# EAGLE board Power Switching Circuit rev1 - old (EAGLE 9.6.2)
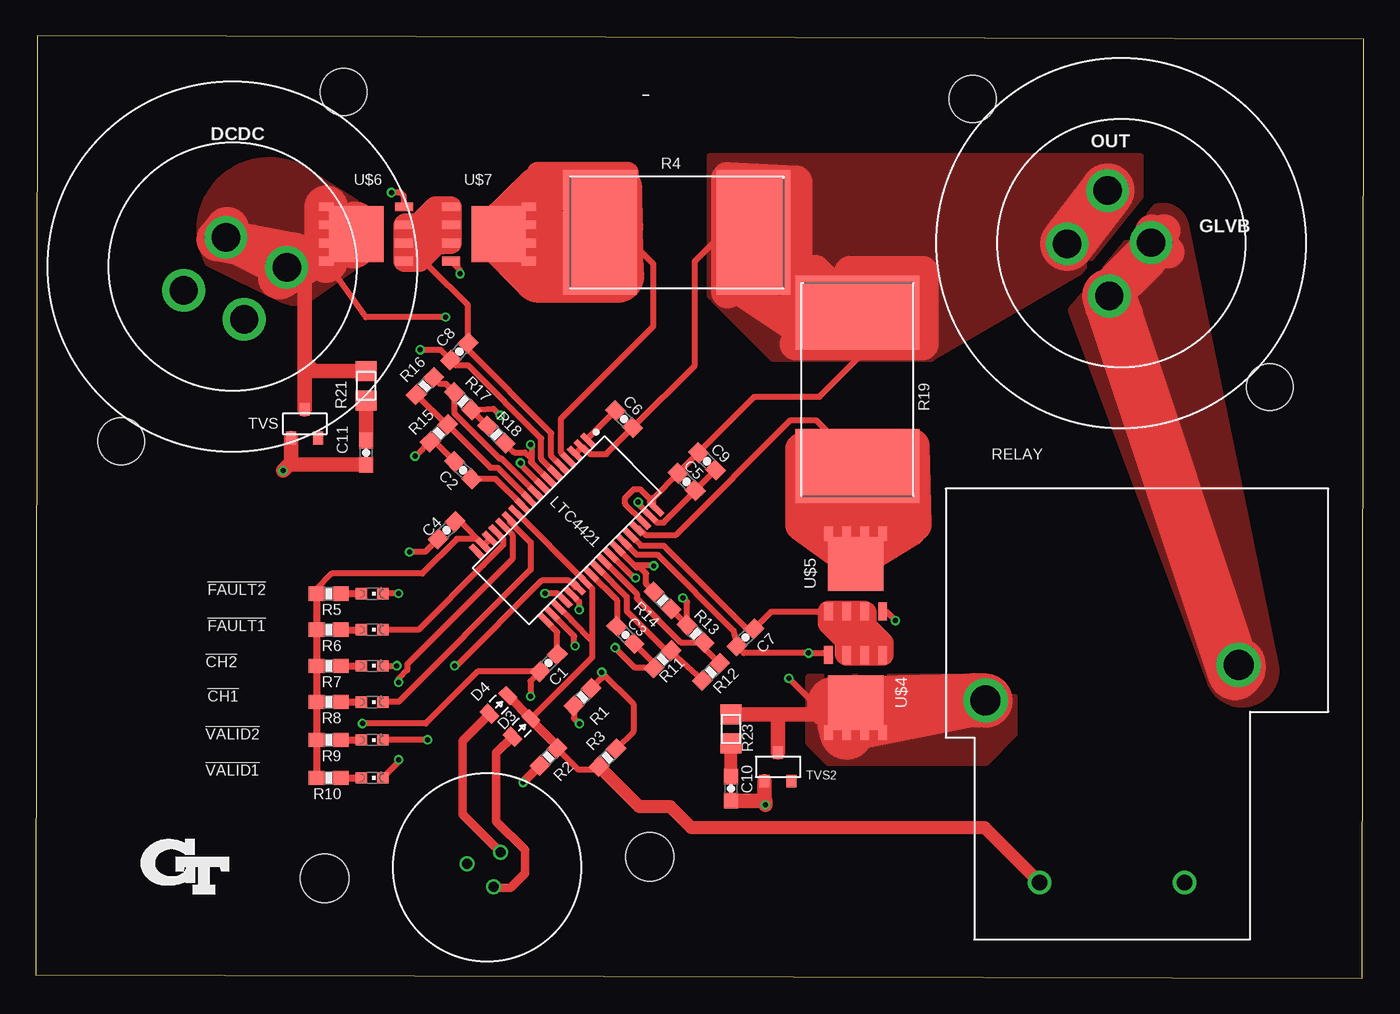
[diagram p0: board, top side]
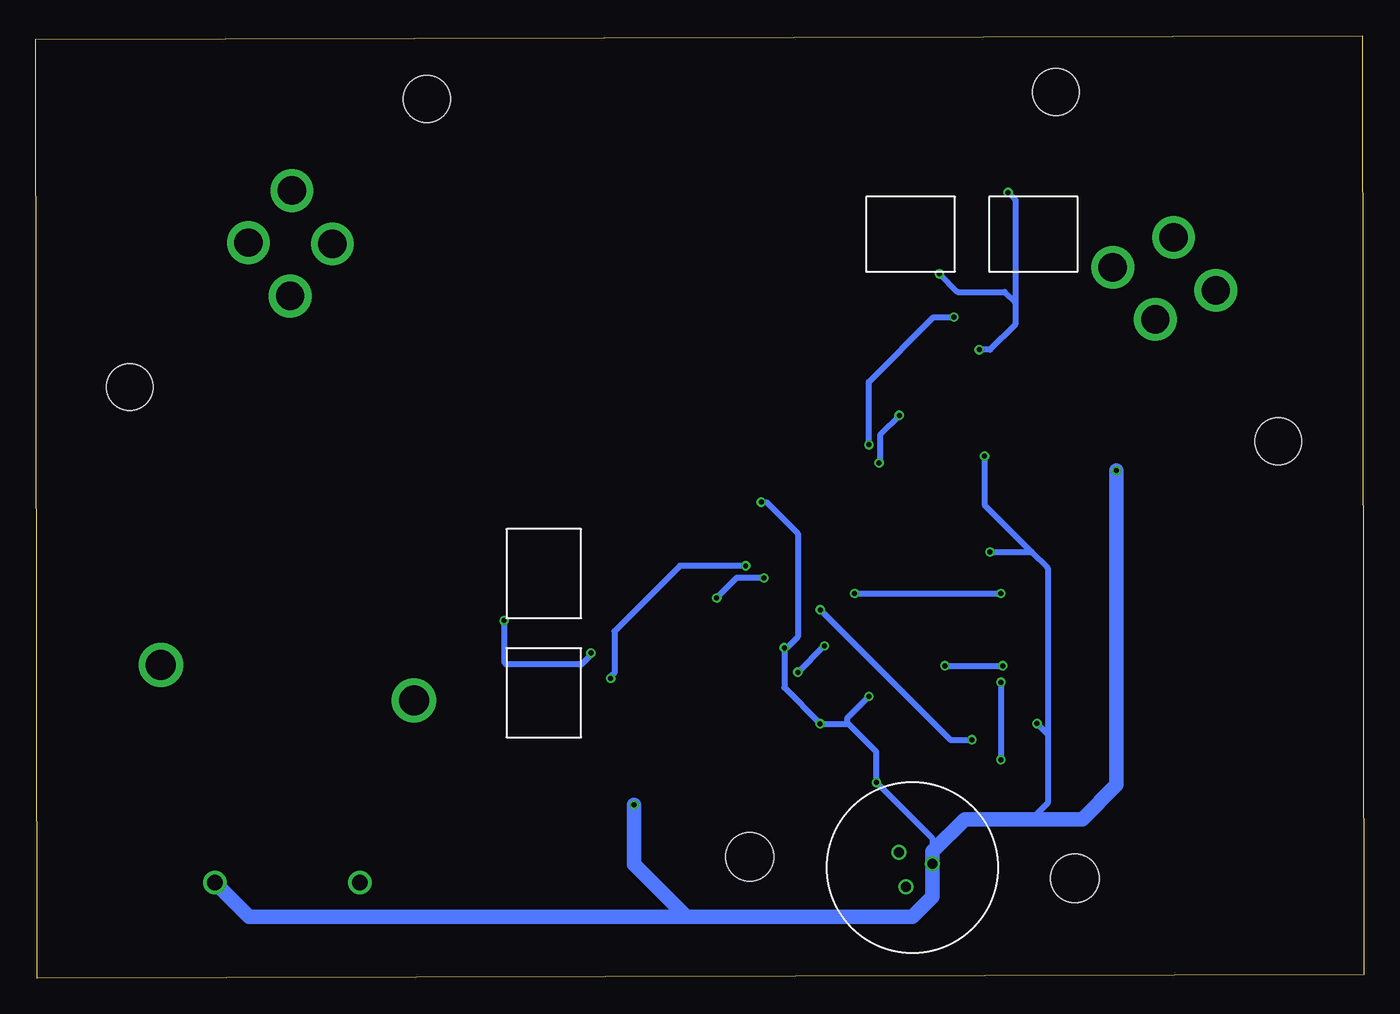
[diagram p1: board, bottom side, seen from below]

Size 93.4 x 66.28 mm. Coordinates in mm from the lower left corner, seen from the top.
Outline: 0,0.25 93.27,0 93.4,66.03 0.13,66.28 0,0.25
Copper layers (1*16): Top 0.035mm / dielectric 1.53mm / Bottom 0.035mm
Design rules "JLCPCB (2 Layer)": minimum track width 5mil, minimum drill 0.3mm, track to track 5mil, track to pad 5mil, pad to pad 5mil, via to via 20mil, smd to smd 5mil, copper to edge 0.2mm, drill to drill 21mil, minimum pad ring 6mil, minimum via ring 6mil, stop-mask expansion 6mil, vias tented up to drill 30mil, thermal gap 10mil

## Footprints (pad centres in the part's own frame; a part is rotated, then mirrored left to right if it is on the bottom)
0603-CAP = smd 1.1 x 1: 1 -0.85,0; 2 0.85,0
0805_D = smd 0.8 x 1.2: A -0.9,0; C 0.9,0
LED-603 = smd 0.8 x 0.8: A 0,-0.75; C 0,0.75
SSOP-36 = smd 0.42 x 1.25: 1 -5.525,-3.375; 2 -4.875,-3.375; 3 -4.225,-3.375; 4 -3.575,-3.375; 5 -2.925,-3.375; 6 -2.275,-3.375; 7 -1.625,-3.375; 8 -0.975,-3.375; 9 -0.325,-3.375; 10 0.325,-3.375; 11 0.975,-3.375; 12 1.625,-3.375; 13 2.275,-3.375; 14 2.925,-3.375; 15 3.575,-3.375; 16 4.225,-3.375; 17 4.875,-3.375; 18 5.525,-3.375; 19 5.525,3.375; 20 4.875,3.375; 21 4.225,3.375; 22 3.575,3.375; 23 2.925,3.375; 24 2.275,3.375; 25 1.625,3.375; 26 0.975,3.375; 27 0.325,3.375; 28 -0.325,3.375; 29 -0.975,3.375; 30 -1.625,3.375; 31 -2.275,3.375; 32 -2.925,3.375; 33 -3.575,3.375; 34 -4.225,3.375; 35 -4.875,3.375; 36 -5.525,3.375
0603-RES = smd 1.1 x 1: 1 -0.85,0; 2 0.85,0
5930-SENSE_RES = smd 5.207 x 8.738: 1 -5.397,0; 2 5.397,0
0805 = smd 1.4 x 1.5: 1 -1.025,0; 2 1.025,0
J115F11A*6* = drill 1.1: COIL1 -5.989,-11.049; COIL2 4.211,-11.049 | drill 2.1: CONTACT1 8.011,4.251; CONTACT2 -9.789,1.751
SOT-23 = smd 0.711 x 0.889: 1 -0.94,-1.003; 2 0.94,-1.003; 3 0,1.003
SO-8-POWERPAK = smd 1.27 x 0.61: 1 -2.54,1.778; 2 -2.54,0.508; 3 -2.54,-0.762; 4 -2.54,-2.032 | smd 1.016 x 0.61: D@5 2.921,-2.032; D@6 2.921,-0.762; D@7 2.921,0.508; D@8 2.921,1.778 | smd 3.81 x 3.912: D@PAD 0.813,-0.127
AUTOSPORT_12-04 = drill 2: 1 0,3.81; 2 3.708,0.889; 3 0,-2.108; 4 -3.708,0.889 | hole 3.3: -10.288,-10.288; 10.288,10.288
AUTOSPORT_04-35 = drill 0.7: A 1.24,0.339; B 0,-1.811; C -1.24,0.339 | hole 3.4: 8.1,7.719; -8.1,-8.481

## Placement (x,y rotation side)
C1  1nF  [0603-CAP]  36.08,22.16 225 top
C2  6.8nF  [0603-CAP]  30.06,35.72 135 top
C3  6.8nF  [0603-CAP]  41.47,24.13 315 top
C4  1uF  [0603-CAP]  28.9,31.5 225 top
C5  0.1uF  [0603-CAP]  45.78,34.91 135 top
C6  1uF  [0603-CAP]  41.38,39.31 135 top
C7  47nF  [0603-CAP]  49.91,23.95 225 top
C8  47nF  [0603-CAP]  29.79,44.07 225 top
C9  600uF  [0603-CAP]  47.22,36.35 315 top
C10  10uF  [0603-CAP]  48.89,13.34 270 top
C11  10uF  [0603-CAP]  23.24,36.96 270 top
D3  DIODEREMOVE_IN_XML  [0805_D]  34.19,17.62 45 top
D4  DIODEREMOVE_IN_XML  [0805_D]  32.57,19.24 45 top
LED1  BLUE  [LED-603]  23.66,14.09 270 top
LED2  BLUE  [LED-603]  23.66,16.75 270 top
LED3  GREEN  [LED-603]  23.66,19.42 270 top
LED4  GREEN  [LED-603]  23.66,21.96 270 top
LED5  RED  [LED-603]  23.66,24.5 270 top
LED6  RED  [LED-603]  23.66,27.04 270 top
LTC4421  LTC4421  [SSOP-36]  37.34,31.5 225 top
R1  0  [0603-RES]  38.46,19.77 225 top
R2  10k  [0603-RES]  36.07,15.55 45 top
R3  0  [0603-RES]  40.21,15.51 45 top
R4  0.001  [5930-SENSE_RES]  45.09,52.45 0 top
R5  100k  [0603-RES]  20.61,27.04 180 top
R6  100k  [0603-RES]  20.61,24.5 180 top
R7  100k  [0603-RES]  20.61,21.96 180 top
R8  100k  [0603-RES]  20.61,19.42 180 top
R9  100k  [0603-RES]  20.61,16.75 180 top
R10  100k  [0603-RES]  20.61,14.09 180 top
R11  31k  [0603-RES]  44.07,22.43 45 top
R12  19k  [0603-RES]  47.49,21.53 45 top
R13  9.5k  [0603-RES]  46.41,24.22 135 top
R14  950k  [0603-RES]  44.07,26.56 135 top
R15  35k  [0603-RES]  28.36,38.32 45 top
R16  11k  [0603-RES]  27.37,41.64 45 top
R17  6.5k  [0603-RES]  30.06,40.57 315 top
R18  950k  [0603-RES]  32.4,38.23 315 top
R19  0.001  [5930-SENSE_RES]  57.78,41.4 90 top
R21  0.55  [0805]  23.24,41.66 90 top
R23  0.65  [0805]  48.89,17.53 90 top
RELAY  J115F11A6*  [J115F11A*6*]  76.58,17.78 0 top
TVS  TVS_15V  [SOT-23]  18.92,38.99 0 top
TVS2  TVS_15V  [SOT-23]  52.2,14.86 0 top
U$4  SIR638ADP  [SO-8-POWERPAK]  57.78,20.19 270 top
U$5  SIR638ADP  [SO-8-POWERPAK]  57.53,28.32 90 top
U$6  SIR638ADP  [SO-8-POWERPAK]  23.37,52.2 180 top
U$7  SIR638ADP  [SO-8-POWERPAK]  31.75,52.45 0 top
X1  CONNECTOR-4AUTOSPORT  [AUTOSPORT_12-04]  76.33,51.69 90.9 top
X2  CONNECTOR-4AUTOSPORT  [AUTOSPORT_12-04]  13.84,50.04 192.5 top
X3  CONNECTOR-3  [AUTOSPORT_04-35]  31.5,7.49 138.8 top

## Library data of the parts
C1-C11 D3 D4 LED1-LED6 LTC4421 R1-R19 R21 R23 RELAY U$4-U$7 X1-X3 = HyTechDevices
TVS TVS2 = HyTechDevices; DKPN: GSOT15-E3-08CT-ND; MANUFACTURER: Vishay General Semiconductor - Diodes Division; MOPN: 78-GSOT15-E3-08; MPN: GSOT15-E3-08; VOLTAGE: 15V

## Nets
!CH1: LED3.C LTC4421.13
!CH2: LED4.C LTC4421.24
!FAULT1: LED5.C LTC4421.15
!FAULT2: LED6.C LTC4421.22
!SHDN: D3.C D4.C LTC4421.12 LTC4421.21 LTC4421.25 R2.2 R3.1 RELAY.COIL1
!VALID1: LED1.C LTC4421.14
!VALID2: LED2.C LTC4421.23
CASIN: C4.1 LTC4421.16 LTC4421.17 R5.2 R6.2 R7.2 R8.2 R9.2 R10.2
CPO: C6.2 LTC4421.1
DCDC: LTC4421.7 R18.2 R21.2 TVS.3 U$6.D@5 U$6.D@6 U$6.D@7 U$6.D@8 U$6.D@PAD X2.3 X2.4
GATE1: C8.2 LTC4421.6 U$6.4 U$7.4
GATE2: C7.2 LTC4421.31 U$4.4 U$5.4
GLVB: RELAY.CONTACT1 X1.3 X1.4
GLVMS: D4.A X3.B
GND: C1.2 C2.2 C3.2 C4.2 C5.1 C9.2 C10.2 C11.2 LTC4421.35 R1.2 R2.1 R11.1 R15.1 RELAY.COIL2 TVS2.1 TVS.1 X3.A
N$1: C1.1 LTC4421.19
N$2: C2.1 LTC4421.11
N$3: C3.1 LTC4421.26
N$4: C10.1 R23.1
N$11: LED6.A R5.1
N$13: LED5.A R6.1
N$15: LED4.A R7.1
N$17: LED3.A R8.1
N$19: LED2.A R9.1
N$21: LED1.A R10.1
N$22: C11.1 R21.1
OUT: C5.2 C6.1 C9.1 LTC4421.2 LTC4421.3 LTC4421.34 LTC4421.36 R4.2 R19.2 X1.1 X1.2
OV1: LTC4421.10 R15.2 R16.1
OV2: LTC4421.27 R11.2 R12.1
RELAY: LTC4421.30 R14.2 R23.2 RELAY.CONTACT2 TVS2.3 U$4.D@5 U$4.D@6 U$4.D@7 U$4.D@8 U$4.D@PAD
RETRY: LTC4421.20 R1.1 R3.2
SENSE: LTC4421.4 R4.1 U$7.D@5 U$7.D@6 U$7.D@7 U$7.D@8 U$7.D@PAD
SENSE2: LTC4421.33 R19.1 U$5.D@5 U$5.D@6 U$5.D@7 U$5.D@8 U$5.D@PAD
SOURCE1: C8.1 LTC4421.5 U$6.1 U$6.2 U$6.3 U$7.1 U$7.2 U$7.3
SOURCE2: C7.1 LTC4421.32 U$4.1 U$4.2 U$4.3 U$5.1 U$5.2 U$5.3
START: D3.A X3.C
UVF1: LTC4421.8 R17.2 R18.1
UVF2: LTC4421.29 R13.2 R14.1
UVR1: LTC4421.9 R16.2 R17.1
UVR2: LTC4421.28 R12.2 R13.1

## Tracks (layer width: path | path; a pad name or v marks a point on that pad's centre or on a via)
!CH1
  Top 0.406: LED3.C 24.36,19.47 24.4,19.43 25.53,19.43 34.82,28.72 34.82,30.64 33.34,32.12 LTC4421.13
!CH2  (via drill 0.35)
  Top 0.406: 24.42,21.97 LED4.C 24.42,21.97 v25.4,21.97 | v29.46,21.97 29.59,21.97 35.58,27.96 37.5,27.96 37.96,27.5 LTC4421.24
  Bottom 0.406: v29.46,21.97 v25.4,21.97
!FAULT1
  Top 0.406: LTC4421.15 32.42,31.33 32.88,30.87 32.88,30.46 31.48,29.05 31.47,29.05 26.91,24.5 LED5.C
!FAULT2  (via drill 0.35)
  Top 0.406: LTC4421.22 36.73,27.05 v35.81,27.05 | v25.53,27.05 v25.52,27.04 LED6.C
  Bottom 0.406: v35.81,27.05 v25.53,27.05
!SHDN
  Top 0.406: LTC4421.21 37.67,25.19 39.13,23.73 | 39.13,23.73 | 39.13,23.73 39.13,22.57 D3.C | LTC4421.12 LTC4421.25 39.13,27.4 39.13,23.73 | R3.1 39.61,14.78 39.48,14.66 38.17,14.66 R2.2
  Top 0.61: R2.2 36.67,16.34 34.88,18.13 | 34.88,18.13 34.82,18.19 D3.C | D4.C 34.88,18.2 34.88,18.13
  Top 0.914: RELAY.COIL1 66.73,10.59 46.11,10.59 44.64,12.06 42.46,12.06 R3.1
!VALID1  (via drill 0.35)
  Top 0.406: LTC4421.14 33.53,31.17 33.53,29.46 26.13,22.07 26.13,21.67 25.53,21.06 v25.53,20.81 | LED1.C 25.53,15.2 v25.53,15.37
  Bottom 0.406: v25.53,20.81 v25.53,15.37
!VALID2  (via drill 0.35)
  Top 0.406: LED2.C 24.42,16.77 24.43,16.76 v27.56,16.76 | v38.23,25.91 38.23,26.47 LTC4421.23
  Bottom 0.406: v38.23,25.91 29.09,16.76 v27.56,16.76
CASIN
  Top 0.406: LTC4421.17 LTC4421.16 | 29.84,32.1 C4.1 | R5.2 19.73,27.08 19.73,27.34 20.83,28.45 27.18,28.45 29.63,30.9 31.02,30.9 31.48,30.44 LTC4421.17 | LTC4421.17 29.84,32.1 | 29.84,32.1 C4.1 | C4.1 29.84,32.1 | 29.84,32.1
  Top 0.508: R5.2 R6.2 R7.2 R8.2 R9.2 R10.2
CPO
  Top 0.406: LTC4421.1 38.86,37.99 C6.2
DCDC  (via drill 0.35)
  Top 0.406: LTC4421.7 34.91,36.22 | 34.91,36.22 34.91,37.41 v34.81,37.51 | 34.91,36.22 34.82,36.31 34.82,36.55 34.39,36.98 33.66,36.98 R18.2 | R21.2 23.74,42.68 | v28.83,46.48 23.24,46.48 U$6.D@8
  Top 1.016: TVS.3 18.92,42.67 | 18.92,42.67 18.93,42.68 | 18.92,42.67 18.92,43.31 | 18.92,43.31 18.92,48.71 X2.4 | R21.2 19.55,42.68 18.92,43.31
  Top 3.048: X2.3 X2.4 17.14,49.28 18.8,50.29 18.16,50.93 12.83,51.94 13.46,52.7 | U$6.D@8 U$6.D@5 | U$6.D@PAD 22.35,51.44 22.48,53.09
  Bottom 0.406: v34.81,37.51 34.81,41.93 30.25,46.48 v28.83,46.48
  pour Top: 12.1,50.22 17.4,47.62 arc52 19.18,47.62 23.37,50.55 23.37,54.1 19.08,56.83 arc152
GATE1  (via drill 0.35)
  Top 0.406: LTC4421.6 35.54,36.51 35.54,37.96 30.4,43.1 29.56,43.1 C8.2 | U$6.4 25.91,54.99 25.65,55.25 v25.02,55.25 | U$7.4 29.84,49.78 v29.84,49.53 | v27.05,44.2 28.46,44.2 C8.2 | C8.2
  Bottom 0.406: v25.02,55.25 24.51,54.74 24.51,47.5 | 24.51,47.5 24.51,45.97 26.29,44.2 v27.05,44.2 | v29.84,49.53 28.57,48.26 25.27,48.26 24.51,47.5
GATE2  (via drill 0.35)
  Top 0.406: LTC4421.31 42.26,29.79 43.71,29.79 49.08,24.42 C7.2 49.8,22.86 v54.36,22.86 55.63,22.86 U$4.4 | U$5.4 59.82,25.78 v60.45,25.15
  Bottom 0.406: v60.45,25.15 60.45,22.23 60.33,22.1 54.99,22.1 54.36,22.73 v54.36,22.86
GLVB
  Top 2.286: 76.73,46.74 X1.4 78.44,50.91 | X1.3 78.44,50.91 | 78.44,50.91 78.44,50.5 75.06,47.12 74.93,47.12 74.93,48.22 X1.3 | X1.3 79.29,52.58 79.38,52.58 78.52,51.72 X1.3 | X1.3 78.96,51.72 79.63,51.05 77.77,51.05 X1.3 | X1.3 78.44,52.53 78.49,52.58
  Top 3.81: RELAY.CONTACT1 84.59,21.73 84.33,21.46 X1.4
  pour Top: 78.74,54.23 73.41,47.75 72.77,46.99 82.55,20.83 arc166 87.25,21.97 80.9,52.96 arc96
GLVMS
  Top 0.61: D4.A 30.02,16.68 30.02,12.05 30.02,11.53 X3.B
GND  (via drill 0.35)
  Top 0.406: C3.2 43.47,22.13 R11.1 | C9.2 C5.1 46.38,34.25 44.16,32.04 43.69,32.04 LTC4421.35 42.46,33.27 42.46,33.39 v42.37,33.48 | R11.1 43.51,21.82 | R1.2 37.85,18.28 v38.24,17.9 v38.23,17.89 | R11.1 42.16,21.82 v40.75,23.23 | v34.8,19.81 34.8,20.87 C1.2 31.08,21.55 27.43,17.91 v22.99,17.91 | C4.2 27.37,29.97 v26.29,29.97 | C2.2 28.06,37.72 R15.1 26.8,36.76 26.8,36.7 v26.67,36.7
  Top 0.61: R2.1 v34.28,13.76
  Top 0.914: 23.24,36.07 C11.2 23.2,36.07
  Top 1.016: C11.2 18.12,36.11 | TVS.1 17.98,36.25 18.12,36.11 | 18.12,36.11 17.82,36.11 v17.4,35.69 | v51.31,12.19 51.31,12.45 51.27,12.49 | TVS2.1 51.26,12.5 51.27,12.49 | C10.2 51.27,12.49
  Bottom 0.406: 36.28,17.91 34.28,15.91 v34.28,13.76 30.34,9.82 X3.A | v42.37,33.48 42.01,33.48 39.81,31.27 39.81,24 40.57,23.23 v40.75,23.23 40.75,20.43 38.24,17.92 v38.24,17.9 | v26.29,29.97 23.37,29.97 | 23.37,29.97 22.23,28.83 22.23,17.15 | 22.23,17.15 22.23,12.32 23.37,11.18 27.18,11.18 | 28.07,11.18 26.54,11.18 | v38.24,17.9 38.22,17.91 | v38.24,17.9 36.29,17.9 36.28,17.91 | 36.28,17.91 36.34,17.98 36.34,18.27 v34.8,19.81 | v22.99,17.91 22.23,17.15 | v26.67,36.7 26.67,33.27 23.37,29.97
  Bottom 1.016: v17.4,35.69 17.4,13.59 19.81,11.18 28.07,11.18 30.34,8.9 X3.A 30.34,5.73 31.75,4.32 47.62,4.32 | v51.31,12.19 51.31,8 47.62,4.32 | RELAY.COIL2 78.38,4.32 47.62,4.32
N$1
  Top 0.406: C1.1 36.68,24.34 LTC4421.19
N$2
  Top 0.406: LTC4421.11 32.34,35.12 C2.1
N$3
  Top 0.406: LTC4421.26 40.87,26.59 C3.1
N$4
  Top 0.914: C10.1 R23.1
N$11
  Top 0.508: R5.1 LED6.A
N$13
  Top 0.508: R6.1 LED5.A
N$15
  Top 0.508: R7.1 LED4.A
N$17
  Top 0.508: R8.1 LED3.A
N$19
  Top 0.508: R9.1 LED2.A
N$21
  Top 0.508: R10.1 LED1.A
N$22
  Top 1.016: C11.1 R21.1
OUT
  Top 0.406: LTC4421.36 43.45,33.2 | 43.45,33.2 43.45,33.78 C5.2 C9.1 50.56,40.89 55.12,40.89 57.78,43.56 R19.2 | LTC4421.3 LTC4421.2 38.52,37.33 39,36.84 40.12,36.84 C6.1 46.36,43.08 46.36,50.42 49.02,53.09 50.42,53.09 | 43.45,33.2 43.19,33.45 43.19,33.69 42.49,34.39 42.07,34.39 41.46,33.78 41.46,33.35 LTC4421.34
  Top 2.286: 54.79,49.71 R19.2 57.28,49.66 62.36,49.66 62.36,44.58 58.55,44.58 | 58.55,44.58 53.47,44.58 | 58.55,44.58 53.47,48.39 53.47,45.85 49.66,48.39 53.47,49.66 53.47,56.01 48.64,56.26 48.64,53.21 48.64,48.26
  Top 3.81: X1.1 X1.2
  pour Top: 47.37,57.4 47.37,48.01 51.82,43.56 62.99,43.56 63.12,43.69 73.41,49.66 77.72,54.99 77.72,57.78 47.37,57.78
OV1
  Top 0.406: 26.84,41.04 R16.1 28.89,38.92 R15.2 31.98,35.9 32.48,35.9 LTC4421.10
OV2
  Top 0.406: R11.2 44.67,22.96 | 44.67,22.96 R12.1 | LTC4421.27 41.56,26.82 41.56,25.84 44.44,22.96 44.67,22.96
RELAY  (via drill 0.35)
  Top 0.406: v43.47,29 43.39,29.07 42.06,29.07 LTC4421.30 42.25,28.88 42.49,28.88 42.92,28.45 42.92,27.71 R14.2 | v52.96,21.08 54.86,19.18 57.28,19.18
  Top 0.914: R23.2
  Top 1.016: U$4.D@PAD 56.83,18.55 52.2,18.55 | 52.2,18.55 R23.2 | TVS2.3 52.2,18.55
  Top 3.81: U$4.D@6 56.9,17.78 65.91,19.56 RELAY.CONTACT2 56.13,19.3
  Bottom 0.406: v43.47,29 47.12,29 48.09,29 52.7,24.38 52.7,21.46 52.96,21.21 v52.96,21.08
  pour Top: 54.36,21.21 67.44,21.21 68.83,19.81 68.83,17.15 66.8,15.11 63.12,15.11 55.75,15.11 54.48,16.38 54.36,16.51
RETRY  (via drill 0.35)
  Top 0.406: LTC4421.20 37.88,24.06 37.88,23.42 v37.93,23.36 | R1.1 39.8,21.11 v39.8,21.51 42.04,19.27 42.04,17.34 R3.2
  Bottom 0.406: v39.8,21.51 37.95,23.36 v37.93,23.36
SENSE
  Top 0.406: 37,36.89 LTC4421.4 36.96,36.93 36.96,39.37 43.43,45.85 43.43,50.21 40.82,52.83
  Top 1.524: U$7.D@PAD 36.32,56.26 35.31,56.64 41.66,56.64
  Top 3.81: R4.1 37,52.04 U$7.D@6 | U$7.D@5 U$7.D@6 | U$7.D@6 U$7.D@7 U$7.D@8 35.69,55.37 U$7.D@PAD 35.43,49.4 40.89,49.4 40.82,52.83 40.77,55.5
SENSE2
  Top 0.406: LTC4421.33 42.41,31.64 42.87,31.18 45.02,31.18 53.09,39.24 54.86,39.24 58.29,35.81 58.29,35.69 58.29,34.8
  Top 1.524: U$5.D@8 U$5.D@7 U$5.D@6 U$5.D@5
  Top 2.286: U$5.D@8 57.28,35.69 U$5.D@PAD | R19.1 53.85,37.21 53.85,31.88 | U$5.D@PAD 57.66,30.61 U$5.D@6 | 59.82,34.42 U$5.D@PAD | U$5.D@PAD 58.29,35.69 | U$5.D@PAD 53.85,31.88 | 53.85,31.88 54.74,33.15 | U$5.D@PAD 61.47,31.5 | U$5.D@PAD 61.85,31.88 61.72,37.47 60.45,32.38
SOURCE1
  Top 0.406: LTC4421.5 36.26,36.71 36.26,38.32 30.4,44.19 C8.1 30.4,47.33 27.69,50.04 27.69,52.58
  Top 1.524: U$6.2 U$6.1 27.01,50.42 28.21,51.61 U$7.3 U$7.2 | U$6.2 U$6.3 | U$7.2 U$7.1 28.11,54.23 26.91,53.03 | U$6.3 26.91,53.03 | U$6.3 25.98,53.03 26.91,53.03 | U$7.2 27.94,51.69 U$6.2 | U$6.2 26.8,52.58 27.69,52.58 | U$6.3 27.56,52.96 28.07,53.47
SOURCE2
  Top 0.406: LTC4421.32 42.55,30.42 44.16,30.42 50.16,24.42 C7.1 51.74,25.78 U$5.1
  Top 1.524: U$5.3 58.37,25.71 58.37,24.78 59.56,23.58 U$4.1 U$4.3 56.95,22.81 56.95,23.74 55.75,24.93 U$5.1 57.28,25.78 | U$4.2 57.28,25.78 | U$5.3 57.28,25.78 | U$5.2 U$5.3
START
  Top 0.61: D3.A 32.4,15.83 32.4,14.1 32.4,11.04 34.42,9.02 34.42,7.37 33.4,6.35 32.28,6.35 X3.C
UVF1  (via drill 0.35)
  Top 0.406: R18.1 R17.2 32.19,40.05 v32.67,39.58 | LTC4421.8 34.11,36.11 34.11,36.23 v34.09,36.24
  Bottom 0.406: v34.09,36.24 33.98,36.35 33.98,38.26 v32.67,39.58
UVF2  (via drill 0.35)
  Top 0.406: R14.1 R13.2 45.81,26.44 v45.51,26.74 | v42.19,28.14 42.07,28.14 LTC4421.29
  Bottom 0.406: v42.19,28.14 44.1,28.14 v45.51,26.74
UVR1
  Top 0.406: LTC4421.9 32.77,36.52 32.64,36.52 29.55,39.61 29.46,39.7 R17.1 28.85,41.78 28.43,41.78 R16.2
UVR2
  Top 0.406: LTC4421.28 42.28,27.02 42.28,26.71 45.36,23.62 R13.1 47.01,23.21 R12.2

## Text on the board
tPlace: DCDC | OUT | GLVB | !FAULT2 | !FAULT1 | !CH2 | !CH1 | !VALID2 | !VALID1
tDocu: HyTech Racing 2021 / Power Switching Board rev1 / By: Sathya Gummadi